# Altium PCB PCB_Hammond_1591GSGY-test.PcbDoc
Units mil, origin at the board's own origin, x right, y up, seen from the top; angles counter-clockwise.
Board outline 4566.93 x 3503.94 mil, 2 copper layers (Top Layer, Bottom Layer); 47 components, 80 nets, 349 pads, 105 vias.
Unrouted connection lines stored in the file: 2.
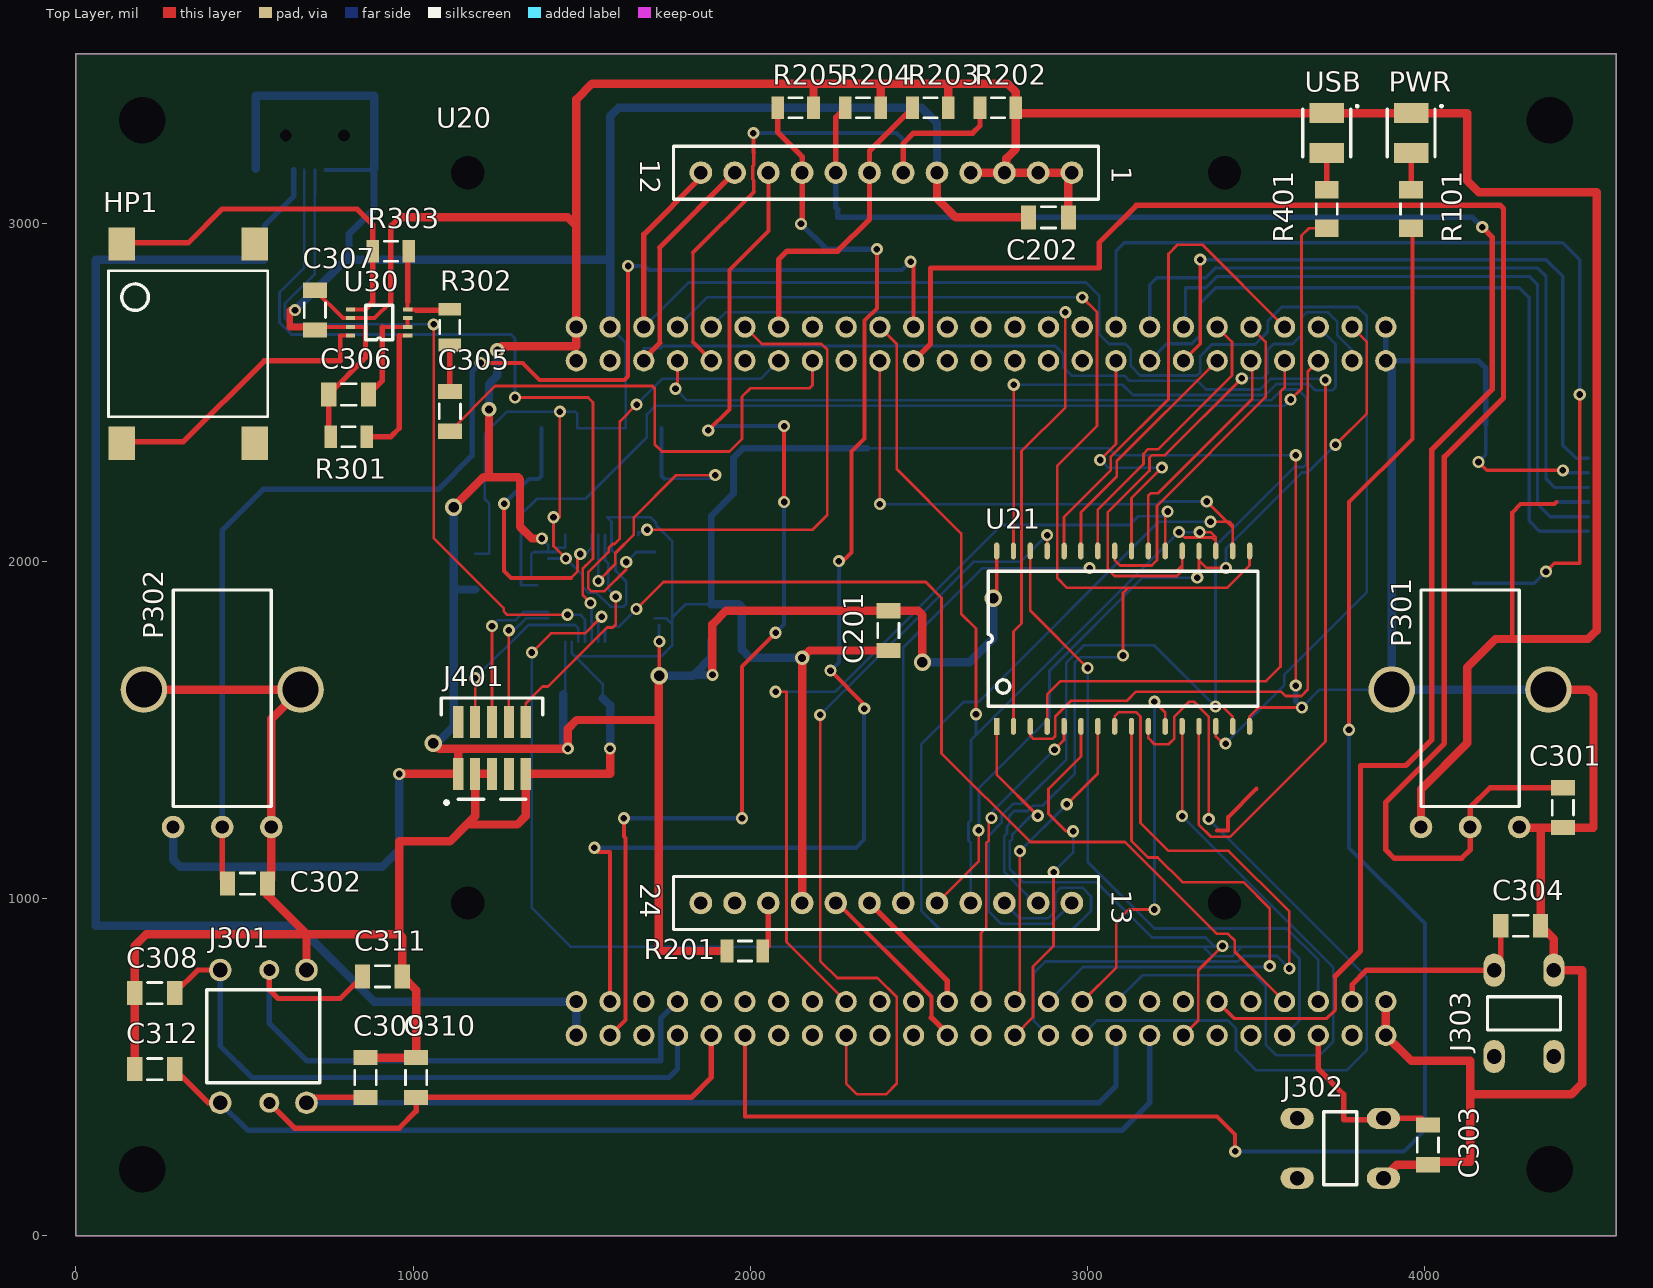
[diagram p0: Top Layer view]
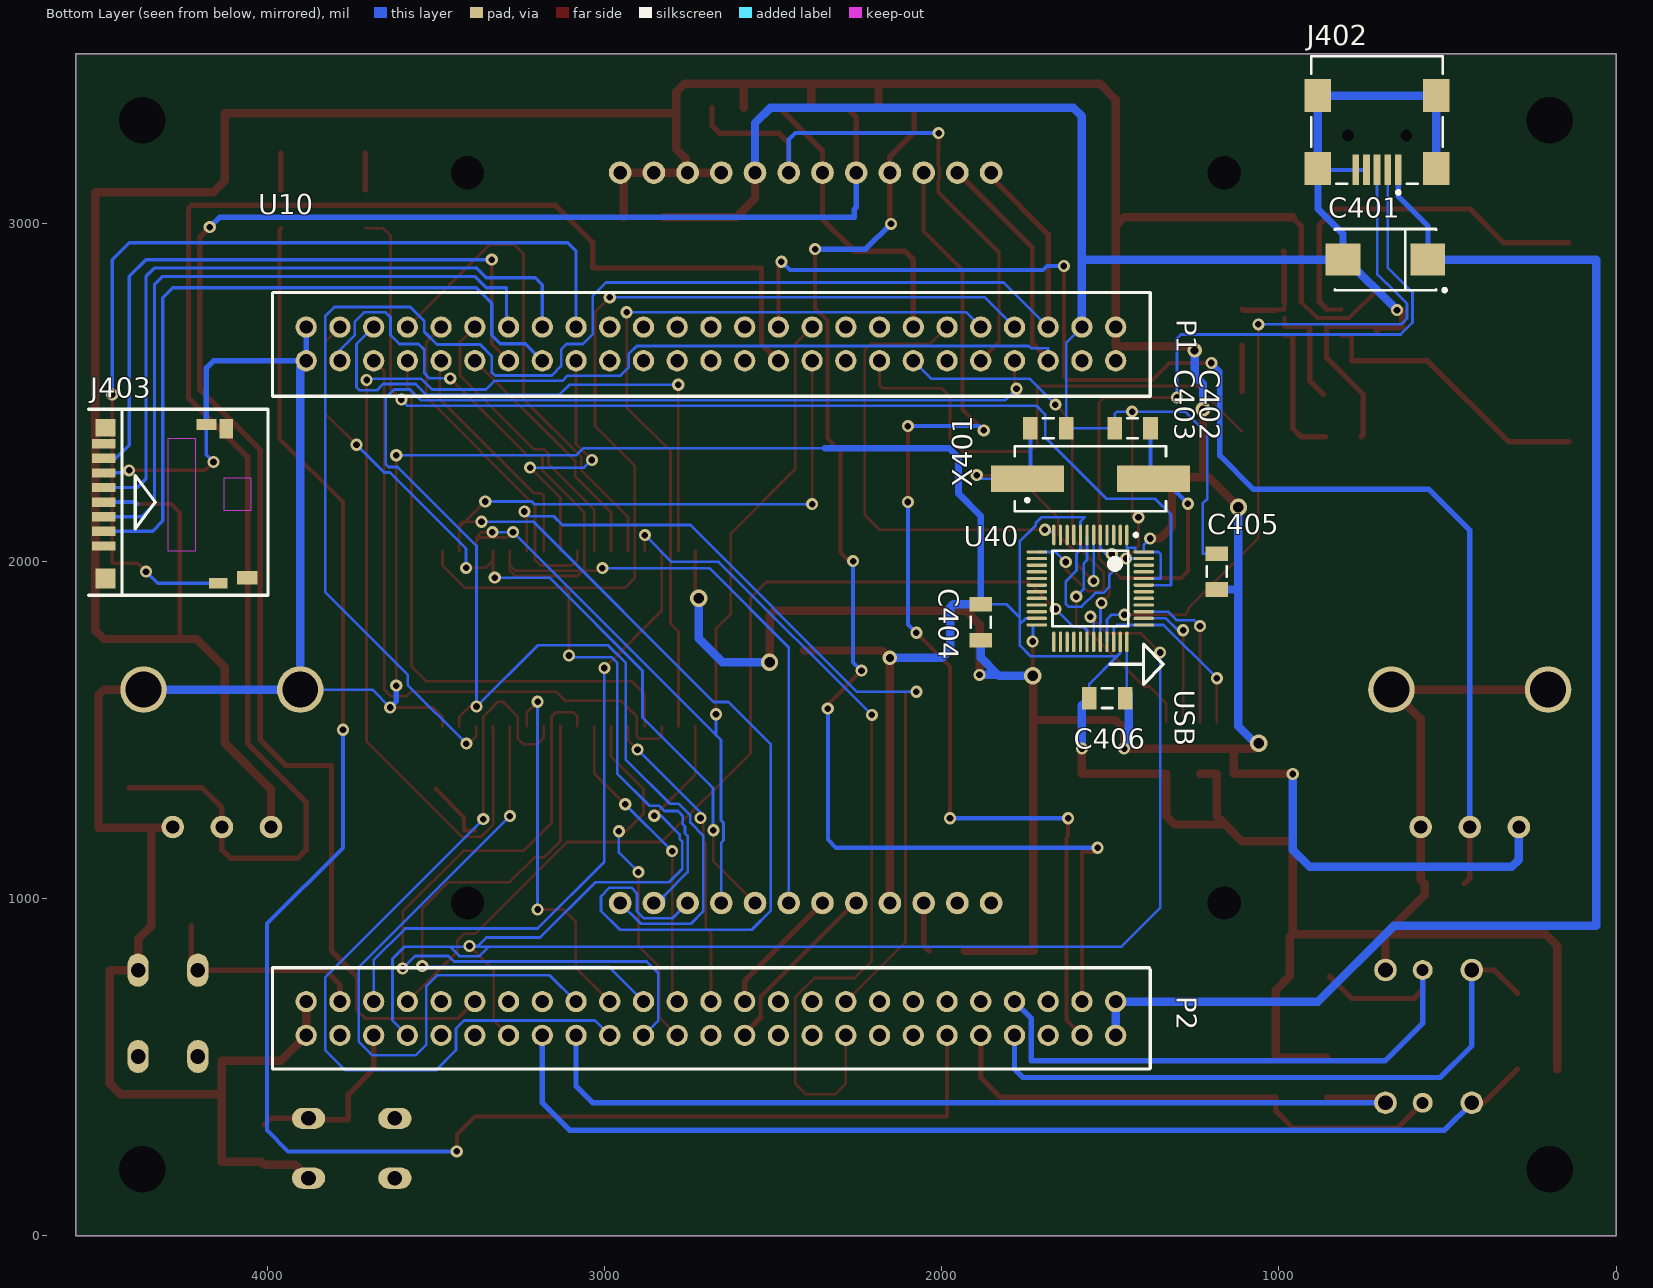
[diagram p1: Bottom Layer view, seen from below]

## Layer stack, top to bottom
Top Layer: signal copper 1.4
Dielectric: dielectric 12.6, FR-4, Dk 4.8
Bottom Layer: signal copper 1.4

## Board outline
0,0 4566.93,0 4566.93,3503.94 0,3503.94

## Design rules (kind name [scope] priority, off if disabled: settings)
Clearance "Polygon Clearance" [InPolygon] p1: gap=16
Clearance [All] p2: gap=8
ComponentClearance [All] p1 off: gap=10 collisioncheckmode=3 verticalgap=10 showdistances=FALSE
DiffPairsRouting [All] p1: maxlimit=393.7 minlimit=4.92 mostfreqgap=5.91 maxuncoupledlength=500
FabricationTestPointUsage FabricationTestPointUsage_1 [All] p1: valid=0 allowmultiple=FALSE
FabricationTestpoint FabricationTestpoint_1 [All] p1: side=3 testpointundercomponent=TRUE minsize=40 maxsize=100 preferedsize=60 minholesize=0 maxholesize=40 preferedholesize=32 testpointgrid=1 allowsidetop=TRUE allowsidebottom=TRUE usegrid=TRUE gridtolerance=0.01
HoleSize [All] p1: absolutevalues=TRUE maxlimit=236.22 minlimit=7.87 maxpercent=80.000 minpercent=20.000
HoleSize FabricationTestpoint [All] p2 off: absolutevalues=TRUE maxlimit=100 minlimit=1 maxpercent=80.000 minpercent=20.000
HoleSize FabricationTestPointUsage [All] p3 off: absolutevalues=TRUE maxlimit=100 minlimit=1 maxpercent=80.000 minpercent=20.000
MinimumSolderMaskSliver [All] p1: minsoldermaskwidth=1.93
PlaneClearance [All] p1: clearance=19.68
PlaneConnect [All] p1: planeconnectstyle=Relief reliefexpansion=15.75 reliefentries=4 reliefconductorwidth=5.91 reliefairgap=5.91
PolygonConnect [All] p1: connectstyle=Relief reliefconductorwidth=5.91 reliefentries=4 polygonreliefangle="90 Angle" airgapwidth=10
RoutingCorners [All] p1: cornerstyle=45-Degree minsetback=49.21 maxsetback=49.21
RoutingVias [All] p1: holewidth=19.68 width=35.83 viastyle="Through Hole" minholewidth=19.68 minwidth=35.83 maxholewidth=78.74 maxwidth=86.61
SilkscreenOverComponentPads [All] p1: minsilkscreentomaskgap=10
SolderMaskExpansion [All] p1: expansion=2.95
Width [All] p1: maxlimit=393.7 minlimit=8 preferedwidth=8
18 further rules are at their usual default settings.

## Classes and differential pairs
net class D[0..7]: D0 D1 D2 D3 D4 D5 D6 D7
net class A[0..18]: A0 A1 A2 A3 A4 A5 A6 A7 A8 A9 A10 A11 A12 A13 A14 A15 A16 A17 A18
component class Power_Debug: C401 C402 C403 C404 C405 C406 J401 J402 J403 R401 U40 USB X401
component class MCU: PWR R101 U10
component class LCD_SRAM: C201 C202 R201 R202 R203 R204 R205 U20 U21
component class Audio_Keys: C301 C302 C303 C304 C305 C306 C307 C308 C309 C310 C311 C312 HP1 J301 J302 J303 P301 P302 R301 R302 R303 U30

## Components (designator, comment, footprint, x,y, rotation, side; value= is the part's Value field where it differs from the comment)
C201 "CAP 100nF 16V 1206(3216)" CAPC1206(3216)100_N 2408.91,1793.91 r270 top
C202 "CAP 100nF 16V 1206(3216)" CAPC1206(3216)100_N 2883.91,3018.91 r180 top
C301 "CAP 100nF 16V 1206(3216)" CAPC1206(3216)100_N 4408.91,1268.91 r90 top
C302 "CAP 100nF 16V 1206(3216)" CAPC1206(3216)100_N 508.91,1043.91 r180 top
C303 "CAP 100nF 16V 1206(3216)" CAPC1206(3216)100_N 4008.91,268.91 r90 top
C304 "CAP 100nF 16V 1206(3216)" CAPC1206(3216)100_N 4283.91,918.91 r180 top
C305 "CAP 100nF 16V 1206(3216)" CAPC1206(3216)100_N 1108.91,2443.91 r270 top
C306 "CAP 100nF 16V 1206(3216)" CAPC1206(3216)100_N 808.91,2493.91 r180 top
C307 "CAP 100nF 16V 1206(3216)" CAPC1206(3216)100_N 708.91,2743.91 r270 top
C308 "CAP 100nF 16V 1206(3216)" CAPC1206(3216)100_N 233.91,718.91 r180 top
C309 "CAP 100nF 16V 1206(3216)" CAPC1206(3216)100_N 858.91,468.91 r90 top
C310 "CAP 100nF 16V 1206(3216)" CAPC1206(3216)100_N 1008.91,468.91 r90 top
C311 "CAP 100nF 16V 1206(3216)" CAPC1206(3216)100_N 908.91,768.91 r0 top
C312 "CAP 100nF 16V 1206(3216)" CAPC1206(3216)100_N 233.91,493.91 r180 top
C401 "Cap Pol3" "EIA 7343-31 D" 683.91,2893.91 r0 bottom
C402 "Cap Semi" CAPC3216L 1433.91,2393.91 r0 bottom
C403 "Cap Semi" CAPC3216L 1683.91,2393.91 r180 bottom
C404 "Cap Semi" CAPC3216L 1883.91,1818.91 r270 bottom
C405 "Cap Semi" CAPC3216L 1183.91,1968.91 r270 bottom
C406 "Cap Semi" CAPC3216L 1508.91,1593.91 r180 bottom
HP1 "NDT-03C" NDT-03C 530,2940 r270 top locked
J301 "SKQUCAA010" SKQUCAA010 683.91,393.91 r90 top locked
J302 "SPST MicroSwitch" SPST_MicroSwitch 3758.91,268.91 r180 top locked
J303 "SPST MicroSwitch" SPST_MicroSwitch 4283.91,668.91 r270 top locked
J401 "JTAG-10" 2199SB-10G-301523 1333.91,1368.91 r90 top
J402 "440247-1" 440247 708.91,3468.91 r90 bottom locked
J403 "DM3D-SF" DM3D-SF 4508.91,1918.91 r270 bottom locked
P301 "POT Type 51" "POT Type 51" 4133.91,1618.91 r0 top locked
P302 "POT Type 51" "POT Type 51" 433.91,1618.91 r0 top locked
PWR "TopLed" PLCC-2 3958.91,3268.91 r90 top
R101 "Res_EU" RESC3216N 3958.91,3043.91 r90 top
R201 "10K" RESC1206(3216)_L 1983.91,843.91 r0 top
R202 "10K" RESC1206(3216)_L 2733.91,3343.91 r180 top
R203 "10K" RESC1206(3216)_L 2533.91,3343.91 r180 top
R204 "10K" RESC1206(3216)_L 2333.91,3343.91 r180 top
R205 "10K" RESC1206(3216)_L 2133.91,3343.91 r180 top
R301 "10K" RESC1206(3216)_L 808.91,2368.91 r0 top
R302 "10K" RESC1206(3216)_L 1108.91,2693.91 r90 top
R303 "10K" RESC1206(3216)_L 933.91,2918.91 r180 top
R401 "Res_EU" RESC3216N 3708.91,3043.91 r90 top
U10 "STM32F3-DISCOVERY" STM32F3-DISCOVERY 2483.91,1693.91 r270 bottom locked
U20 "INT024BTFT" INT024BTFT 2283.91,2068.91 r270 top locked
U21 "AS64C4008" SOP32 2730,1510 r90 top
U30 "TS4990" MiniSOP-8 983.91,2668.91 r180 top
U40 "STM32F103C4T6A" LQFP48_L 1558.91,1918.91 r270 bottom
USB "TopLed" PLCC-2 3708.91,3268.91 r90 top
X401 "HC49/4H_SMX" HC49/4H_SMX 1558.91,2243.91 r180 bottom

## Footprints (in the part's own frame and the unit in brackets; to place one, negate y for a bottom-side part, rotate by r counter-clockwise, add the part's x,y. Pads: shape width x height; smd on the part's side, far side on the other; paste and mask are expansions set on the pad)
2199SB-10G-301523 [mm] "Embase male 2x5 contacts, 1.27 mm"
  rect 2.4x0.76 smd: 1(0,5.08) 2(3.9,5.08) 3(0,3.81) 4(3.9,3.81) 5(0,2.54) 6(3.9,2.54) 7(0,1.27) 8(3.9,1.27) 9(0,0) 10(3.9,0)
  silkscreen extent -2.29,-1.27 5.71,6.35, body extent -1.3,-0.48 5.2,5.56, height 4.55
440247 [mm] "Connector; USB2.0, Type B, SM; 5 Position; Right Angle"
  rect 2.3x0.5 smd: 1(-7.85,-1.6) 2(-7.85,-0.8) 3(-7.85,0) 4(-7.85,0.8) 5(-7.85,1.6)
  rect 2.5x2 smd: 6(-7.75,4.45) 7(-2.25,4.45) 8(-7.75,-4.45) 9(-2.25,-4.45)
  round 0.6 hole 0.9 unplated: MH1(-5.25,2.2) MH2(-5.25,-2.2)
  silkscreen extent -9.67,-4.95 0.7,4.95
CAPC1206(3216)100_N [mm] "Chip Capacitor, Body 3.2x1.6mm, Height 1mm, IPC Medium Density"
  rect 1.15x1.8 smd: 1(-1.5,0) 2(1.5,0)
  silkscreen extent -0.55,-0.8 0.55,0.8, body extent -1.7,-0.9 1.7,0.9, height 1
CAPC3216L [mm] "Chip Capacitor, Body 3.2x1.6mm, IPC High Density"
  rect 1.1x1.7 smd: 1(-1.35,0) 2(1.35,0)
  silkscreen extent -0.4,-0.75 0.4,0.75, body extent -1.7,-0.9 1.7,0.9, height 1.3
DM3D-SF [mm] "MicroSD card connector"
  rect 0.7x1.75 smd: 1(-3.2,0.625) 2(-4.3,0.625) 3(-5.4,0.625) 4(-6.5,0.625) 5(-7.6,0.625) 6(-8.7,0.625) 7(-9.8,0.625) 8(-10.9,0.625)
  rect 0.8x1.4 smd: A(-0.4,9.25)
  rect 0.8x1.5 smd: B(-12.35,8.35)
  rect 1.5x1.5 smd: G0(-0.75,0.75)
  rect 1.3x1.5 smd: G1(-12.1,0.75)
  rect 1x1.55 smd: G2(-0.8,11.425)
  rect 1.45x1 smd: G3(-12.025,9.85)
  Top Layer keep-out region: -8.35,11.7 -5.85,11.7 -5.85,9.7 -8.35,9.7
  Top Layer keep-out region: -11.3,7.5 -2.8,7.5 -2.8,5.5 -11.3,5.5
  silkscreen extent -13.5,-0.5 0.5,13
"EIA 7343-31 D" [mm] "Capacitor, SM Tantalum; Body 7.3 x 4.3 mm (LxW typ)"
  rect 2.6x2.4 smd: 1(-3.2,0) 2(3.2,0)
  silkscreen extent -4.57,-2.3 3.8,2.42
HC49/4H_SMX [mm] "Surface Mount Quartz Crystal; Body 13.4 (inc. leads) x 4.9 mm (LxW max)"
  rect 5.5x2 smd: 1(-4.75,0) 2(4.75,0)
  silkscreen extent -5.7,-2.45 5.7,2.45
INT024BTFT [mm]
  round 1.7 hole 1: 1(-27.5,17) 2(-27.5,14.46) 3(-27.5,11.92) 4(-27.5,9.38) 5(-27.5,6.84) 6(-27.5,4.3) 7(-27.5,1.76) 8(-27.5,-0.78) 9(-27.5,-3.32) 10(-27.5,-5.86) 11(-27.5,-8.4) 12(-27.5,-10.94) 13(27.5,17) 14(27.5,14.46) 15(27.5,11.92) 16(27.5,9.38) 17(27.5,6.84) 18(27.5,4.3) 19(27.5,1.76) 20(27.5,-0.78) 21(27.5,-3.32) 22(27.5,-5.86) 23(27.5,-8.4) 24(27.5,-10.94)
  round 1.524 hole 2.5 unplated: D1(-27.5,28.5) D2(27.5,28.5) D3(27.5,-28.5) D4(-27.5,-28.5)
  silkscreen extent -29.5,-13 29.5,19
LQFP48_L [mm] "Thin QFP, 48-Leads, Body 7x7mm, Pitch 0.5mm, IPC High Density"
  oval 1.55x0.25 smd: 1(-4.025,2.75) 2(-4.025,2.25) 3(-4.025,1.75) 4(-4.025,1.25) 5(-4.025,0.75) 6(-4.025,0.25) 7(-4.025,-0.25) 8(-4.025,-0.75) 9(-4.025,-1.25) 10(-4.025,-1.75) 11(-4.025,-2.25) 12(-4.025,-2.75) 25(4.025,-2.75) 26(4.025,-2.25) 27(4.025,-1.75) 28(4.025,-1.25) 29(4.025,-0.75) 30(4.025,-0.25) 31(4.025,0.25) 32(4.025,0.75) 33(4.025,1.25) 34(4.025,1.75) 35(4.025,2.25) 36(4.025,2.75)
  oval 0.25x1.55 smd: 13(-2.75,-4.025) 14(-2.25,-4.025) 15(-1.75,-4.025) 16(-1.25,-4.025) 17(-0.75,-4.025) 18(-0.25,-4.025) 19(0.25,-4.025) 20(0.75,-4.025) 21(1.25,-4.025) 22(1.75,-4.025) 23(2.25,-4.025) 24(2.75,-4.025) 37(2.75,4.025) 38(2.25,4.025) 39(1.75,4.025) 40(1.25,4.025) 41(0.75,4.025) 42(0.25,4.025) 43(-0.25,4.025) 44(-0.75,4.025) 45(-1.25,4.025) 46(-1.75,4.025) 47(-2.25,4.025) 48(-2.75,4.025)
  silkscreen extent -4.15,-2.85 2.85,3.55, body extent -3.5,-3.5 3.5,3.5, height 1.6
MiniSOP-8 [mm]
  rect 0.7x0.3 smd: 1(0,0) 2(0,-0.65) 3(0,-1.3) 4(0,-1.95) 5(4.3,-1.95) 6(4.3,-1.3) 7(4.3,-0.65) 8(4.3,0)
  silkscreen extent 1.13,-2.28 3.16,0.33
NDT-03C [mm]
  rect 2.5x2 smd: 1(0,0) 2(0,-10) 3(15,-10) 4(15,0)
  silkscreen extent 2,-11 13,1
PLCC-2 [mm]
  rect 1.5x2.6 smd: A(-1.5,0) K(1.5,0)
  silkscreen extent -1.8,-2.34 2.08,1.8
"POT Type 51" [mm]
  round 1.7 hole 1: 1(-3.7,-10.35) 2(0,-10.35) 3(3.7,-10.35)
  round 3.5 hole 2.7: 4(-5.9,0) 5(5.9,0)
  silkscreen extent -3.7,-8.8 3.7,7.5
RESC1206(3216)_L [mm] "Chip Resistor, Body 3.2x1.6mm, IPC High Density"
  rect 0.95x1.7 smd: 1(-1.35,0) 2(1.35,0)
  silkscreen extent -0.5,-0.75 0.5,0.75, body extent -1.67,-0.87 1.67,0.87, height 0.75
RESC3216N [mm] "Chip Resistor, Body 3.2x1.6mm, IPC Medium Density"
  rect 1.3x1.8 smd: 1(-1.45,0) 2(1.45,0)
  silkscreen extent -0.4,-0.8 0.4,0.8, body extent -1.68,-0.87 1.68,0.87, height 0.71
SKQUCAA010 [mm] "4 ways + Center switch"
  round 1.7 hole 1.1: 1(0,6.5) 3(0,0) 4(10,0) 6(10,6.5)
  round 1.5 hole 0.9: 2(0,2.8) 5(10,2.8)
  silkscreen extent 1.5,-1 8.5,7.5
SOP32 [mil]
  rect 50x16 smd: 1(0,0)
  oval 50x16 smd: 2(0,-50) 3(0,-100) 4(0,-150) 5(0,-200) 6(0,-250) 7(0,-300) 8(0,-350) 9(0,-400) 10(0,-450) 11(0,-500) 12(0,-550) 13(0,-600) 14(0,-650) 15(0,-700) 16(0,-750) 17(520,-750) 18(520,-700) 19(520,-650) 20(520,-600) 21(520,-550) 22(520,-500) 23(520,-450) 24(520,-400) 25(520,-350) 26(520,-300) 27(520,-250) 28(520,-200) 29(520,-150) 30(520,-100) 31(520,-50) 32(520,0)
  silkscreen extent 60,-775 460,25
SPST_MicroSwitch [mm]
  oval 2.5x1.6 hole 1.1: 1(-3,2.5) 2(3.5,2.5) 3(-3,-2) 4(3.5,-2)
  silkscreen extent -1,-2.5 1.5,3
STM32F3-DISCOVERY [mm]
  round 1.6 hole 1: 1(-25.4,25.4) 2(-22.86,25.4) 3(-25.4,22.86) 4(-22.86,22.86) 5(-25.4,20.32) 6(-22.86,20.32) 7(-25.4,17.78) 8(-22.86,17.78) 9(-25.4,15.24) 10(-22.86,15.24) 11(-25.4,12.7) 12(-22.86,12.7) 13(-25.4,10.16) 14(-22.86,10.16) 15(-25.4,7.62) 16(-22.86,7.62) 17(-25.4,5.08) 18(-22.86,5.08) 19(-25.4,2.54) 20(-22.86,2.54) 21(-25.4,0) 22(-22.86,0) 23(-25.4,-2.54) 24(-22.86,-2.54) 25(-25.4,-5.08) 26(-22.86,-5.08) 27(-25.4,-7.62) 28(-22.86,-7.62) 29(-25.4,-10.16) 30(-22.86,-10.16) 31(-25.4,-12.7) 32(-22.86,-12.7) 33(-25.4,-15.24) 34(-22.86,-15.24) 35(-25.4,-17.78) 36(-22.86,-17.78) 37(-25.4,-20.32) 38(-22.86,-20.32) 39(-25.4,-22.86) 40(-22.86,-22.86) 41(-25.4,-25.4) 42(-22.86,-25.4) 43(-25.4,-27.94) 44(-22.86,-27.94) 45(-25.4,-30.48) 46(-22.86,-30.48) 47(-25.4,-33.02) 48(-22.86,-33.02) 49(-25.4,-35.56) 50(-22.86,-35.56) 51(25.4,25.4) 52(27.94,25.4) 53(25.4,22.86) 54(27.94,22.86) 55(25.4,20.32) 56(27.94,20.32) 57(25.4,17.78) 58(27.94,17.78) 59(25.4,15.24) 60(27.94,15.24) 61(25.4,12.7) 62(27.94,12.7) 63(25.4,10.16) 64(27.94,10.16) 65(25.4,7.62) 66(27.94,7.62) 67(25.4,5.08) 68(27.94,5.08) 69(25.4,2.54) 70(27.94,2.54) 71(25.4,0) 72(27.94,0) 73(25.4,-2.54) 74(27.94,-2.54) 75(25.4,-5.08) 76(27.94,-5.08) 77(25.4,-7.62) 78(27.94,-7.62) 79(25.4,-10.16) 80(27.94,-10.16) 81(25.4,-12.7) 82(27.94,-12.7) 83(25.4,-15.24) 84(27.94,-15.24) 85(25.4,-17.78) 86(27.94,-17.78) 87(25.4,-20.32) 88(27.94,-20.32) 89(25.4,-22.86) 90(27.94,-22.86) 91(25.4,-25.4) 92(27.94,-25.4) 93(25.4,-27.94) 94(27.94,-27.94) 95(25.4,-30.48) 96(27.94,-30.48) 97(25.4,-33.02) 98(27.94,-33.02) 99(25.4,-35.56) 100(27.94,-35.56)
  silkscreen extent -28,-38.1 30.48,29

## Part data
C201 C202 C301 C302 C303 C304 C305 C306 C307 C308 C309 C310 C311 C312: library part CMP-1037-04185-1, "CAP 100nF 16V -20% to +80% 1206 (3216 Metric) Thickness 1mm SMD"
C401: "Polarized Capacitor (Surface Mount)"
C402 C403 C404 C405 C406: "Capacitor (Semiconductor SIM Model)"
HP1: "Audio HP"
J301: "4 ways + center switch"
J302 J303: "SPST - MicroSwitch"
J402: "USB 2.0, Right Angle, SMT, B Type, Receptacle, 5 Position, Black"
P301 P302: "25mm Diameter potentiometer"
R101 R401: "Resistor"
R201 R202 R203 R204 R205 R301 R302 R303: library part CMP-1014-00623-1, "10K 0.25W 1% 1206 (3216 Metric)  SMD"
U10: "STM32F3-Discovery"
U20: library part "LCD INT024BTFT"
U21: "SRAM 4Mbits 512K*8Bits 55 ns"
U40: "STM32 ARM-based 32-bit MCU Performance Line with 16 kB Flash, 6 kB Internal RAM, Internal Code A, -40 to +85°C Temperature, 48-Pin LQFP, Tray"
X401: "Surface Mount Quartz Crystal"

## Free pads (board coordinates)
  round 129.92 hole 137.8: 1(196.85,196.85) 1(196.85,3307.09) 1(4370.08,196.85) 1(4370.08,3307.09)

## Via types
v1: diameter 35.83, hole 19.68, Top Layer to Bottom Layer, 97 vias
v2: diameter 51.18, hole 31.5, Top Layer to Bottom Layer, 5 vias
v3: diameter 43.31, hole 23.62, Top Layer to Bottom Layer, 3 vias

## Nets (pads, with @x,y where several pads share a name; then routed paths per layer and width w, separated by ;. In a path a pad name is that pad's centre, name@x,y a point inside that pad or via, vN(x,y) a via of type N, cw(c..) or ccw(c..) an arc to the next point about the centre after c; other vN are vias at no path point)
5V: C401.1 J402.1 U10.51 U10.52 | length 4394.6
  Bottom Layer w16: C401.1 557.93,2992.93 645.92,3080.92 J402.1
  Bottom Layer w25: C401.1 58.91,2893.91 58.91,918.91 658.91,918.91 883.91,693.91 U10.51 U10.52
A0: U10.83 U21.12 | length 2014
  Top Layer w8: v1(3280,1243.82) U21.12
  Bottom Layer w8: U10.83 3161.91,771.91 3495.91,771.91 3527.91,739.91 3527.91,566.41 3559.91,534.41 3687.91,534.41 3727.91,574.41 3727.91,795.91 v1(3280,1243.82)
A1: U10.81 U21.11 | length 1108.9
  Top Layer w8: U10.81 3084.91,794.91 3084.91,930.91 3120.91,966.91 v1(3197.91,966.91) ; v1(3197.91,1582.91) 3230,1550.82 U21.11
  Bottom Layer w8: v1(3197.91,966.91) v1(3197.91,1582.91)
A2: U10.82 U21.10 | length 2498.5
  Top Layer w8: U21.10 3180,1474.91 3198,1456.91 3239.91,1456.91 3256.91,1473.91 3256.91,1538.91 3300.91,1582.91 3314.91,1582.91 3358.91,1538.91 v1(3358.91,1234.91)
  Bottom Layer w8: U10.82 3027.91,637.91 3415.91,637.91 3439.91,613.91 3439.91,549.91 3499.91,489.91 3766.91,489.91 3827.91,550.91 3827.91,765.91 v1(3358.91,1234.91)
A3: U10.79 U21.9 | length 1703.3
  Top Layer w8: U21.9 3130,1170.57 3179.42,1121.15 3207.67,1121.15 3280.91,1047.91 3462.49,1047.91 3539.91,970.49 v1(3539.91,798.91)
  Bottom Layer w8: U10.79 2986.55,796.55 3537.55,796.55 v1(3539.91,798.91)
A4: U10.80 U21.8 | length 2147.2
  Top Layer w8: U21.8 3080,1538.91 3093,1551.91 3143.91,1551.91 3156.91,1538.91 3156.91,1223.91 3239.91,1140.91 3417.91,1140.91 3597.91,960.91 v1(3597.91,791.91)
  Bottom Layer w8: U10.80 2839.91,637.91 2839.91,777.91 2874.55,812.55 3445.76,812.55 3462.12,828.91 3560.91,828.91 v1(3597.91,791.91)
A5: U10.77 U21.7 | length 918
  Top Layer w8: U10.77 2798.91,708.91 v1(2798.91,1139.91) ; v1(2937.91,1278.91) 3030,1371 U21.7
  Bottom Layer w8: v1(2798.91,1139.91) v1(2937.91,1278.91)
A6: U10.78 U21.6 | length 1070
  Top Layer w8: U10.78 2837.91,647.91 2837.91,797.91 2898.91,858.91 v1(2898.91,1077.91) ; v1(2956.91,1198.91) 2936,1198.91 2884,1250.91 2884,1324.91 2980,1420.91 U21.6
  Bottom Layer w8: v1(2898.91,1077.91) 2956.91,1135.91 v1(2956.91,1198.91)
A7: U10.75 U21.5 | length 918
  Top Layer w8: U10.75 2683.91,896.91 2698.91,911.91 2698.91,1163.84 2706.82,1171.76 2706.82,1230.35 v1(2714.91,1238.43) ; v1(2901.48,1441) 2930,1469.52 U21.5
  Bottom Layer w8: v1(2714.91,1238.43) 2714.91,1254.43 v1(2901.48,1441)
A8: U10.40 U21.27 | length 731.2
  Top Layer w8: U21.27 2980,2144.73 3086.26,2251 3086.26,2296.26 U10.40
A9: U10.39 U21.26 | length 864.7
  Top Layer w8: U21.26 3030,2152.5 3165.36,2287.86 3165.36,2318.14 3179.17,2331.96 3209.45,2331.96 3427.91,2550.41 3427.91,2649.91 U10.39
A10: U10.42 U21.23 | length 706
  Top Layer w8: U21.23 3180,2194.25 3187.15,2201.4 3209.33,2201.4 3487.74,2479.81 3487.74,2590.08 U10.42
A11: U10.41 U21.25 | length 1008.9
  Top Layer w8: U21.25 3080,2002.91 3096,1986.91 3189.91,1986.91 3205.6,2002.6 3205.6,2163.84 3527.91,2486.16 3527.91,2649.91 U10.41
A12: U10.44 U21.4 | length 1732.8
  Top Layer w8: U21.4 2880,1605 2918.91,1643.91 3528.91,1643.91 3572,1687 3572,2502.91 3583.91,2514.82 U10.44
A13: U10.43 U21.28 | length 1465.5
  Top Layer w8: U21.28 2930,2130.62 3068.32,2268.94 3068.32,2308.23 3239.91,2479.82 3239.91,2910.91 3266.91,2937.91 3339.91,2937.91 U10.43
A14: U10.46 U21.3 | length 1946.9
  Top Layer w8: U21.3 2830,1482.82 2839.91,1472.91 2895.91,1472.91 2903.91,1480.91 2903.91,1538.91 2950.91,1585.91 3116.91,1585.91 3143.91,1612.91 3573.81,1612.91 3586.64,1600.08 3633.72,1600.08 3652.55,1618.91 3652.55,2562.55 U10.46
A15: U10.45 U21.31 | length 1684.2
  Top Layer w8: U21.31 2780,2099 2780.91,2099.91 v1(2780.91,2522.91)
  Bottom Layer w8: v1(2780.91,2522.91) 3103.92,2522.91 3134.2,2492.62 3527.21,2492.62 3559.41,2524.82 3656.28,2524.82 3674.51,2506.59 3726.5,2506.59 3734.82,2514.91 3734.82,2643 U10.45
A16: U10.9 U21.2 | length 2359.9
  Top Layer w8: U21.2 2780,1791 2803.91,1814.91 2803.91,2325.91 2933.91,2455.91 v1(2933.91,2737.91)
  Bottom Layer w8: U10.9 1927.91,2737.91 v1(2933.91,2737.91)
A17: U10.95 U21.30 | length 1919.6
  Top Layer w8: U21.30 2830,1852.82 v1(2999.91,1682.91)
  Bottom Layer w8: v1(2999.91,1682.91) 2999.91,1108.53 3197.53,910.91 3589.91,910.91 3683.91,816.91 U10.95
A18: U10.88 U21.1 | length 1558.2
  Top Layer w8: U21.1 2730,1366.91 v1(2852,1244.91) ; U10.88 3327.91,637.91 3327.91,786.91 v1(3399.91,858.91)
  Bottom Layer w8: v1(2852,1244.91) 2832.29,1244.91 2776.82,1189.44 2776.82,1176.52 2768.91,1168.6 2768.91,1086.7 2807.91,1047.7 3026.33,1047.7 3190.11,883.91 3349.91,883.91 3374.91,858.91 v1(3399.91,858.91)
D0: U10.6 U20.11 U21.13 | length 4693.3
  Top Layer w8: U21.13 3330,1492.91 3328.91,1491.82 3328.91,1218.91 3364.91,1182.91 3422.91,1182.91 3704.91,1464.91 v1(3704.91,2536.91)
  Top Layer w12: 1731.28,2646.54 1731.28,2929.67
  Top Layer w16: U10.6 1683.91,2599.17 1731.28,2646.54 ; 1731.28,2929.67 U20.11
  Bottom Layer w8: U10.6 1683.91,2630.91 1733.91,2630.91 1740.91,2637.91 2903.91,2637.91 2927.91,2613.91 2927.91,2573.91 2951.91,2549.91 3108.92,2549.91 3124.41,2534.41 3325.61,2534.41 3351.4,2508.62 3511.21,2508.62 3543.41,2540.82 3701,2540.82 v1(3704.91,2536.91)
D1: U10.5 U20.12 U21.14 | length 4586.7
  Top Layer w8: U21.14 3380,1479.82 3391.91,1467.91 3399.91,1467.91 v1(3408.91,1458.91)
  Top Layer w16: U10.5 1683.91,2968.91 1853.2,3138.2 U20.12
  Bottom Layer w8: U10.5 1815.91,2825.91 2994.91,2825.91 3033.91,2786.91 3033.91,2673.91 3063.91,2643.91 3111.91,2643.91 3127.91,2627.91 3127.91,2577.91 3155.41,2550.41 3324.41,2550.41 3333.91,2559.91 3333.91,2607.91 3367.91,2641.91 3495.91,2641.91 3533.91,2679.91 3533.91,2711.91 3575.41,2753.41 3800.41,2753.41 3827.91,2725.91 3827.91,1908.01 3583.22,1663.32 3583.22,1633.22 v1(3408.91,1458.91)
D2: U10.8 U20.13 U21.15 | length 4802.4
  Top Layer w8: v1(1777.91,2510.91) 1777.91,2517.91 1783.91,2523.91 U10.8 ; v1(3378.91,1568.91) 3400,1568.91 3430,1538.91 U21.15
  Bottom Layer w8: v1(1777.91,2510.91) 1812.2,2476.62 3543.62,2476.62 3575.82,2508.82 3623.91,2508.82 3647.91,2484.82 3647.91,2286.97 3639.91,2278.97 3612.61,2278.97 3378.91,2045.26 v1(3378.91,1568.91) 3197.48,1750.34 2988.34,1750.34 2936.91,1698.91 2936.91,1411.56 2806.09,1280.73 2780.07,1280.73 2744.82,1245.48 2744.82,1224.82 2706.91,1186.91 2706.91,960.91 2743.05,924.77 2891.74,924.77 U20.13
D3: U10.7 U20.14 U21.17 | length 4046.8
  Top Layer w8: v1(2983.91,2781.91) 3027.91,2737.91 3027.91,2400.91 2909.91,2282.91 2909.91,1949.17 2938.46,1920.62 3119.62,1920.62 ; v1(3104.91,1719.91) 3104.91,1905.91 3119.62,1920.62 ; U21.17 3480,1986.91 3413.71,1920.62 3119.62,1920.62
  Bottom Layer w8: U10.7 1871.91,2781.91 v1(2983.91,2781.91) ; U20.14 2821.91,986.23 2821.91,1008.91 2752.91,1077.91 2752.91,1184.6 2760.82,1192.52 2760.82,1212.82 2767.91,1219.91 2767.91,1244.91 2781.91,1258.91 2821.91,1258.91 2837.82,1274.82 2866.82,1274.82 2961.91,1369.91 2961.91,1698.91 2978.26,1715.26 3100.26,1715.26 v1(3104.91,1719.91)
D4: U10.20 U20.15 U21.18 | length 4225.7
  Top Layer w8: v1(2383.91,2168.91) U10.20 ; v1(3353.09,2176.82) 3413.3,2116.61 ; v1(3364.3,2116.61) 3413.3,2116.61 ; U21.18 3430,2099.91 ; 3413.3,2116.61 3430,2099.91 ; 3413.3,2116.61 3420.67,2116.61 3430,2107.28 3430,2099.91
  Bottom Layer w8: v1(2383.91,2168.91) 3207,2168.91 3214.91,2176.82 v1(3353.09,2176.82) ; U20.15 2798.67,940.77 2882.77,940.77 2902.91,960.91 2902.91,1014.7 2919.91,1031.7 2984.12,1031.7 3009.91,1005.91 3009.91,962.91 2953.91,906.91 2562.91,906.91 2506.91,962.91 2506.91,1457.19 2632.19,1582.47 2675.77,1582.47 3209.91,2116.61 v1(3364.3,2116.61)
D5: U10.19 U20.16 U21.19 | length 2965
  Top Layer w8: U10.19 2433.91,2643.91 2433.91,2272.91 2624.91,2081.91 2624.91,1843.91 2668.91,1799.91 v1(2668.91,1545.91) ; v1(3270.91,2085.91) 3286.91,2069.91 3369,2069.91 3380,2058.91 ; v1(3332,2085.91) 3364,2085.91 3380,2069.91 3380,2058.91 ; U21.19 3380,2058.91
  Bottom Layer w8: U20.16 2653.2,1165.05 2646.5,1171.76 2646.5,1224.17 2653.91,1231.58 2653.91,1468.91 2668.91,1483.91 ; v1(2668.91,1545.91) 2668.91,1483.91 ; v1(3332,2085.91) v1(3270.91,2085.91) 2668.91,1483.91
D6: U10.47 U20.17 U21.20 | length 2464.7
  Top Layer w8: U20.17 2676.91,1109.94 v1(2676.91,1201.91) ; v1(3324.91,1950.91) 3330,1956 3330,2001.82 ; U21.20 3330,2001.82 ; v1(3409.91,1979.91) 3351.91,1979.91 3330,2001.82 ; v1(3734.91,2344.91) 3827.91,2437.91 3827.91,2649.91 U10.47
  Bottom Layer w8: v1(2676.91,1201.91) 2677.91,1202.91 2677.91,1326.91 2886.91,1535.91 2886.91,1674.91 3162.91,1950.91 v1(3324.91,1950.91) ; v1(3409.91,1979.91) 3409.91,2036.91 3635.49,2262.49 3652.49,2262.49 v1(3734.91,2344.91)
D7: U10.48 U20.18 U21.21 | length 3320.1
  Top Layer w8: v1(3005.91,1978.91) 3013.91,1970.91 3064.91,1970.91 ; U21.21 3280,1986.91 ; v1(3456.91,2541.91) 3229.18,2314.18 3190.14,2314.18 3183.13,2307.17 3183.13,2268.13 3059.91,2144.91 3059.91,1975.91 3064.91,1970.91 ; 3064.91,1970.91 3079.91,1955.91 3265,1955.91 3280,1970.91 3280,1986.91 ; 3064.91,1970.91 3264,1970.91 3280,1986.91
  Bottom Layer w8: U20.18 2453.2,1743.91 2688.2,1978.91 v1(3005.91,1978.91) ; v1(3456.91,2541.91) 3518.41,2541.91 3533.91,2557.41 3533.91,2626.91 3550.91,2643.91 3607.91,2643.91 3633.91,2669.91 3633.91,2722.91 3648.41,2737.41 3712.41,2737.41 3739.91,2709.91 3739.91,2669.91 3783.91,2625.91 U10.48
GND: C201.2 C202.2 C301.1 C302.1 C303.1 C304.1 C306.2 C307.2 C308.2 C309.2 C310.2 C311.2 C312.2 C401.2 C402.2 C403.2 C404.1 C405.1 C406.1 J301.4 J302.1 J303.1 J401.3 J401.5 J401.9 J402.4 J402.5 J402.6 J402.7 J402.8 J402.9 J403.6 J403.B P301.3 P301.4 P301.5 P302.3 P302.4 P302.5 R301.1 U10.3 U10.49 U10.50 U10.99 U10.100 U20.5 U20.21 U21.16 U30.7 U40.8 U40.23 U40.35 U40.47 | length 23281.6
  Top Layer w8: v1(1416.27,2129.91) 1416.27,2044.13 v1(1452.91,2007.49) ; 1434.91,2129.91 v1(1434.91,2442.91) ; U21.16 3480,1538.91 3507,1565.91 v1(3634.91,1565.91) ; v1(3616.91,1630.91) v1(3616.91,2313.91)
  Top Layer w10: v1(4158.91,2293.91) 4183.91,2268.91 v1(4408.91,2268.91)
  Top Layer w12: C307.2 718.56,2694.5 U30.7 815.21,2693.91 858.91,2693.91
  Top Layer w16: R301.1 749.85,2374.82 C306.2 858.91,2602.97 858.91,2693.91
  Top Layer w20: v1@633.91,2743.91 633.91,2693.91 699.86,2693.91 C307.2
  Top Layer w25: C312.2 C308.2 174.85,859.85 208.91,893.91 683.91,893.91 ; P302.4 P302.5 579.58,1532.3 P302.3 579.58,1055.52 C302.1 567.97,1009.85 683.91,893.91 ; J301.4 683.91,893.91 ; C309.2 C310.2 1008.91,727.97 C311.2 967.97,884.85 958.91,893.91 ; J401.5 J401.3 1183.91,1243.91 1158.91,1218.91 ; v1(1583.91,1443.91) 1583.91,1368.91 J401.9 1333.91,1243.91 1308.91,1218.91 1158.91,1218.91 ; U20.21 v3(2153.2,1713.2) 2174.85,1734.85 C201.2 ; U20.5 2553.2,3074.62 2608.91,3018.91 C202.2 ; J302.1 3916.39,209.85 C303.1 4017.97,218.91 4133.91,218.91 4133.91,418.91 ; U10.99 U10.100 3958.91,518.91 4133.91,518.91 4133.91,418.91 ; P301.3 4281.15,1209.85 4345.03,1209.85 ; P301.5 4483.91,1618.91 4499.85,1602.97 4499.85,1209.85 C301.1 4345.03,1209.85 ; 683.91,893.91 958.91,893.91 ; 958.91,893.91 958.91,1168.91 1108.91,1168.91 1158.91,1218.91 ; 4133.91,418.91 4433.91,418.91 4465.8,450.8 4465.8,787.02 J303.1 4382.34,879.54 C304.1 4342.97,1207.79 4345.03,1209.85
  Bottom Layer w8: C401.2@804.9,2898.9 C401.2@809.89,2903.89 ; C405.1 1225.91,2022.06 1225.91,2170.92 1212,2184.84 1212,2377 1277.91,2442.91 v1(1434.91,2442.91) 1480.41,2442.91 1487.06,2436.26 C402.2 C403.2 1630.76,2647.06 U10.3 ; U40.47 v1(1452.91,2007.49) 1503.15,1957.25 1503.15,1922.91 1520.24,1905.82 1543.91,1905.82 1584.9,1864.84 1623.91,1864.84 1631.91,1872.84 1631.91,1939.42 1599.82,1971.51 1599.82,2022 1588.44,2033.38 U40.8 1588.44,2117.38 1575.91,2129.91 1703.91,2129.91 1720.89,2112.93 1720.89,2105.93 1767.91,2058.91 1767.91,1832.06 ; U40.35 1470.33,1727.49 1479.91,1717.91 ; C406.1 1562.06,1635.76 1479.91,1717.91 ; U40.23 1750.49,1830.33 1767.91,1812.91 ; C404.1 1807.91,1872.06 1767.91,1832.06 ; 2346.3,2334.45 3062.64,2334.45 3083.18,2313.91 v1(3616.91,2313.91) ; v1(3634.91,1565.91) 3687.91,1618.91 P301.4 ; 1479.91,1717.91 1735.91,1717.91 1767.91,1749.91 1767.91,1812.91 ; 1767.91,1812.91 1767.91,1832.06
  Bottom Layer w10: v1(4158.91,2293.91) 4180.17,2315.17 J403.B ; v1(4408.91,2268.91) 4416.39,2261.43 J403.6
  Bottom Layer w12: J402.4 J402.5 J402.6@880.17,3159.85
  Bottom Layer w16: v1(3616.91,1630.91) 3616.91,1583.91 v1(3634.91,1565.91) ; U10.49 U10.50 4158.91,2593.91 4180.17,2572.65 J403.B
  Bottom Layer w20: C401.2 809.89,2903.89 809.89,2969.89 884.11,3044.11 J402.6 ; C404.1 1883.91,2133.91 1950,2200 1950,2306.4 1978.05,2334.45 2346.3,2334.45
  Bottom Layer w25: J402.8 J402.9 J402.7 J402.6 J402.6@880.17,3159.85 ; v1(649.91,2743.91) C401.2@804.9,2898.9 ; C401.2 1580,2893.91 ; C406.1 1583.91,1572.06 v1(1583.91,1443.91) ; U10.3 1583.91,3318.91 1608.91,3343.91 2508.2,3343.91 2553.2,3298.91 U20.5 ; C404.1 1965.44,1872.06 1975,1862.5 1975,1737.5 1999.3,1713.2 v3(2153.2,1713.2) ; U10.50 3901.63,2576.19 P301.4 P301.5
JTCK: J401.4 U40.34 U40.37 | length 546.1
  Top Layer w8: J401.4 v1(1183.91,1652.74)
  Bottom Layer w8: v1(1183.91,1652.74) 1341.81,1810.64 U40.37 1479.91,1810.64 1490.01,1800.54 U40.34
JTDI: J401.8 U40.38 | length 403.7
  Top Layer w8: J401.8 v1(1283.91,1795.06)
  Bottom Layer w8: v1(1283.91,1795.06) 1299.91,1795.06 1335.18,1830.33 U40.38
JTDO: J401.6 U40.39 | length 469
  Top Layer w8: J401.6 v1(1233.91,1807.16)
  Bottom Layer w8: v1(1233.91,1807.16) 1251.72,1824.97 1303.7,1824.97 1328.75,1850.01 U40.39
JTMS: J401.2
KEY_CENTER: C308.1 J301.6 U10.58 | length 1893.3
  Top Layer w16: C308.1 361.67,787.61 J301.6
  Bottom Layer w16: J301.6 428,563 522.1,468.91 1758.91,468.91 1783.91,493.91 U10.58
KEY_DOWN: C309.1 J301.3 U10.84 | length 2752.3
  Top Layer w16: J301.3 699.85,409.85 C309.1
  Bottom Layer w16: J301.3 3033.91,393.91 3083.91,443.91 U10.84
KEY_LEFT: C310.1 J301.2 U10.60 | length 1552.4
  Top Layer w16: J301.2 648.67,318.91 958.91,318.91 1008.91,368.91 C310.1 1824.85,409.85 1883.91,468.91 U10.60
KEY_RIGHT: C311.1 J301.5 U10.57 | length 1932.9
  Top Layer w16: J301.5 573.67,729.15 599.85,702.97 783.91,702.97 C311.1
  Bottom Layer w16: J301.5 573.67,629.15 683.91,518.91 1733.91,518.91 1733.91,643.91 U10.57
KEY_UP: C312.1 J301.1 U10.86 | length 3199.4
  Top Layer w16: C312.1 392.97,393.91 J301.1
  Bottom Layer w16: J301.1 508.91,313 3103,313 3183.91,393.91 U10.86
LCD_CS: R202.2 U10.10 U20.6 | length 1714.5
  Top Layer w10: 1830,2650 1830,2915 ; 2010,3095 2010,3129.08 2006.74,3132.34 2006.74,3170.83 2010,3174.1 2010,3211.96
  Top Layer w12: 1830,2650 1883.91,2596.09 U10.10 ; 1830,2915 2010,3095 ; v1(2008.91,3268.91) 2008.91,3213.05 2010,3211.96
  Top Layer w16: U20.6 2453.2,3238.2 2483.91,3268.91 2658.91,3268.91 2680.76,3290.76 R202.2
  Bottom Layer w12: v1(2008.91,3268.91) 2433.91,3268.91 2453.2,3249.62 U20.6
LCD_RD: R204.2 U10.89 U20.8 | length 5247.9
  Top Layer w10: U10.89 3433.91,643.91 3708.91,643.91 3733.91,668.91 3733.91,768.91
  Top Layer w16: U20.8 2253.2,3316.35 R204.2 ; 3733.91,768.91 3808.91,843.91 3808.91,1393.91 3943.91,1393.91 4020,1470 4020,2330 4200,2510 4200,2960 v1(4170,2990)
  Bottom Layer w16: U20.8 2253.2,3049.62 2258.91,3043.91 2258.91,3020 4140,3020 v1(4170,2990)
LCD_RS: R203.2 U10.13 U20.7 | length 902.2
  Top Layer w16: U10.13 2083.91,2893.91 2108.91,2918.91 2258.91,2918.91 2353.2,3013.2 U20.7 2353.2,3216.35 R203.2
LCD_WR: R205.2 U10.53 U20.9 | length 3792.5
  Top Layer w12: v1(1537.5,1150) 1550,1137.5 1583.91,1137.5 U10.53 ; v1(2237.5,1675) 2337.5,1575 v1(2337.5,1562.5) ; v1(2262.5,2000) 2275,2000 2300,2025 2300,2325 2338.41,2363.41 2338.41,2712.75 2375,2749.34 v1(2375,2925)
  Top Layer w16: R205.2 2080.76,3272.06 2153.2,3199.62 U20.9 2153.2,3003.2 v1(2150,3000)
  Bottom Layer w12: v1(1537.5,1150) 2312.5,1150 2337.5,1175 v1(2337.5,1562.5) ; v1(2237.5,1675) 2262.5,1700 v1(2262.5,2000)
  Bottom Layer w16: v1(2150,3000) 2225,2925 v1(2375,2925)
LED_PWR: R101.1 U10.62 | length 5201.2
  Top Layer w12: U10.62 1983.91,353.59 3383.91,353.59 3437.5,300 v1(3437.5,250) ; v1(3775,1500) 3775,2175 3962.5,2362.5 3962.5,2983.23 R101.1
  Bottom Layer w12: v1(3437.5,250) 3937.5,250 4000,312.5 4000,925 3775,1150 v1(3775,1500)
NetC301_2: C301.2 P301.2 U10.22 | length 4860.3
  Top Layer w16: U10.22 2533.91,2643.91 2533.91,2868.91 3033.91,2868.91 3033.91,2943.91 3144.47,3054.47 4223.64,3054.47 4232.78,3045.33 4232.78,2484.02 4057.78,2309.02 4057.78,1459.02 3883.91,1285.15 3883.91,1143.91 3908.91,1118.91 4108.91,1118.91 4133.91,1143.91 P301.2 4133.91,1268.91 4192.97,1327.97 C301.2
NetC302_2: C302.2 P302.2 U10.21 | length 4011.8
  Top Layer w12: v1(1200,2587.5) 1325,2587.5 1375,2537.5 1626.96,2537.5 1637.5,2548.04 v1(1637.5,2875) ; v1(2475,2887.5) 2483.91,2878.59 U10.21
  Top Layer w16: P302.2 433.91,1059.85 C302.2
  Bottom Layer w12: v1(1637.5,2875) 1687.5,2875 1700,2862.5 2450,2862.5 v1(2475,2887.5)
  Bottom Layer w16: P302.2 433.91,2091.09 555.32,2212.5 1075,2212.5 1175,2312.5 1175,2562.5 v1(1200,2587.5)
NetC303_2: C303.2 J302.3 U10.96 | length 540.8
  Top Layer w16: U10.96 3683.91,493.91 3758.91,418.91 3758.91,343.91 3873.28,343.91 J302.3 3989.22,347.65 C303.2
NetC304_2: C304.2 J303.3 U10.97 | length 629.2
  Top Layer w16: U10.97 3783.91,743.91 3827.02,787.02 J303.3 4224.85,806.71 C304.2
NetC305_1: C305.1 R302.1 | length 137.8
  Top Layer w16: C305.1 R302.1
NetC305_2: C305.2 U10.16 | length 1535.5
  Top Layer w8: C305.2 1242.97,2518.91 1710.08,2518.91 1716.49,2512.5 1716.49,2346.01 1737.5,2325 1937.5,2325 1975,2362.5 1975,2487.5 2000,2512.5 2175,2512.5 2183.91,2521.41 U10.16
NetC306_1: C306.1 U30.2 U30.3 | length 317.8
  Top Layer w12: 908.91,2693.91 909.5,2694.5 U30.2 U30.3
  Top Layer w16: C306.1 908.91,2534.85 908.91,2693.91
NetC402_1: C402.1 U40.5 X401.2 | length 855.1
  Top Layer w8: 1468.24,1950 1487.15,1968.91 1487.15,2012.64 v1(1495.43,2020.91)
  Top Layer w12: v1(1270,2170) 1270,1970 1275.26,1964.74 1290,1950 1468.24,1950
  Bottom Layer w8: v1(1495.43,2020.91) 1511.91,2020.91 1529.38,2038.38 U40.5
  Bottom Layer w12: v1(1270,2170) 1343.91,2243.91 X401.2 1380.76,2252.77 C402.1
NetC403_1: C403.1 U40.6 X401.1 | length 970.1
  Top Layer w8: v1(1549.07,1940.91) 1599.37,1991.21 1599.37,2023.21 1654.41,2078.25 1654.41,2129.12 1780.2,2254.91 v1(1895.91,2254.91)
  Bottom Layer w8: v1(1549.07,1940.91) U40.6 ; X401.1 1884.91,2243.91 v1(1895.91,2254.91)
  Bottom Layer w12: C403.1 1737.06,2252.77 X401.1
NetHP1_2: HP1.2 R303.2 U30.5 | length 1105.1
  Top Layer w12: U30.5 857.14,2745.68
  Top Layer w16: HP1.2@140.21,2943.91 333.91,2943.91 433.91,3043.91 833.91,3043.91 880.76,2997.06 R303.2 880.76,2769.3 857.14,2745.68
NetHP1_3: HP1.3 U30.8 | length 849
  Top Layer w12: 783.91,2593.91 783.91,2668.91 U30.8
  Top Layer w16: HP1.3@140.21,2353.36 318.36,2353.36 558.91,2593.91 783.91,2593.91
NetJ402_2: J402.2 U40.32 | length 2347.4
  Top Layer w8: v1(1301.91,2484.91) 1518.91,2484.91 1533.14,2470.68 1533.14,2007.14 1512.82,1986.82 1511.91,1986.82 1503.15,1978.07 1503.15,1898.67 v1(1525.91,1875.91)
  Bottom Layer w8: J402.2 677.41,2870.33 603.91,2796.83 603.91,2706.91 638.82,2672 1290.5,2672 1301.91,2660.59 v1(1301.91,2484.91) ; v1(1525.91,1875.91) 1529,1872.82 1529,1818.57 1529.38,1818.18 U40.32
NetJ402_3: J402.3 U40.33 | length 2180.8
  Top Layer w8: v1(1060.91,2701.91) 1060.91,2067.91 1268.92,1859.9 1268.92,1850.91 1278.92,1840.91 v1(1457.91,1840.91)
  Bottom Layer w8: J402.3 708.91,3086.91 707.91,3085.91 707.91,2849.91 680.91,2822.91 679.41,2822.91 619.91,2763.41 619.91,2719.41 637.41,2701.91 v1(1060.91,2701.91) ; v1(1457.91,1840.91) 1495.7,1840.91 1509.7,1826.91 U40.33
NetJ403_2: J403.2 U10.36 | length 2132.4
  Bottom Layer w10: U10.36 3233.91,2643.91 3308.91,2643.91 3333.91,2668.91 3333.91,2763.91 3380,2810 4280,2810 4308.91,2781.09 4308.91,2118.91 4339.62,2088.2 J403.2
NetJ403_3: J403.3 U10.37 | length 2002.8
  Bottom Layer w10: U10.37 3290,2700 3290,2810 3350.28,2810 3384.19,2843.91 4308.91,2843.91 4333.91,2818.91 4333.91,2168.91 4371.31,2131.51 J403.3
NetJ403_5: J403.5 U10.35 | length 2067.7
  Bottom Layer w10: U10.35 3183.91,2818.91 3205,2840 3350,2840 3380,2870 3383.91,2868.91 4333.91,2868.91 4358.91,2843.91 4358.91,2243.91 4384.7,2218.12 J403.5
NetJ403_7: J403.7 U10.38 | length 2008
  Top Layer w10: U10.38 3333.91,2643.91 v1(3333.91,2893.91)
  Bottom Layer w10: v1(3333.91,2893.91) 4358.91,2893.91 4408.91,2843.91 4408.91,2343.91 4448.08,2304.74 J403.7
NetJ403_A: J403.A U10.33 | length 2869.8
  Top Layer w10: v1(4358.91,1968.91) 4383.91,1993.91 4458.91,1993.91 v1(4458.91,2493.91)
  Bottom Layer w10: U10.33 3083.91,2918.91 3108.91,2943.91 4408.91,2943.91 4458.91,2893.91 v1(4458.91,2493.91) ; J403.A 4324.66,1934.66 v1(4358.91,1968.91)
NetPWR_1: PWR.A R101.2 | length 108.9
  Top Layer w16: R101.2 PWR.A
NetR201_2: R201.2 U20.22 | length 149
  Top Layer w16: R201.2 2053.2,860.05 U20.22
NetR301_2: R301.2 U30.1 | length 407.2
  Top Layer w12: 958.91,2668.91 U30.1
  Top Layer w16: R301.2 933.91,2368.91 958.91,2393.91 958.91,2668.91
NetR302_2: R302.2 R303.1 U30.4 | length 301.6
  Top Layer w12: 983.91,2768.91 U30.4 1007.14,2745.68 1008.91,2743.91
  Top Layer w16: 983.91,2768.91 983.91,2915.76 R303.1 ; 1008.91,2743.91 1105.76,2743.91 R302.2
NetR401_1: R401.1 U40.43 | length 3302.6
  Top Layer w8: v1(3601.91,2478.91) 3633.91,2510.91 3633.91,2964.82 3655.91,2986.82 R401.1
  Bottom Layer w8: 1367.91,1928.75 1321.25,1928.75 1320,1930 1320,2138.08 1366.75,2184.84 1510.84,2184.84 1693.11,2367.11 1693.11,2434.91 1718.82,2460.62 3583.62,2460.62 v1(3601.91,2478.91)
NetR401_2: R401.2 USB.A | length 108.9
  Top Layer w16: R401.2 USB.A
NetU10_11: U10.11 U40.12 | length 1352.1
  Top Layer w8: v1(1693.91,2092.91) 2183.91,2092.91 2227.91,2136.91 2227.91,2626.91 2210.91,2643.91 2033.91,2643.91 U10.11
  Bottom Layer w8: U40.12 1667.18,2085.91 1686.91,2085.91 v1(1693.91,2092.91)
NetU10_14: U10.14 U40.13 | length 1344.4
  Top Layer w8: v1(1631.91,1997.18) 1631.91,1974.91 1567.91,1910.91 1527.91,1910.91 1519.15,1919.67 1519.15,1965.76 1579.91,2026.52 1579.91,2038.63 1591.91,2050.62 1596.62,2050.62 1612.91,2066.91 1612.91,2413.91 v1(1662.91,2463.91)
  Bottom Layer w8: v1(1631.91,1997.18) 1661.91,2027.18 U40.13 ; v1(1662.91,2463.91) 1739.91,2540.91 2030.91,2540.91 U10.14
NetU10_34: U10.34 U21.24 | length 790.1
  Top Layer w8: v1(3036.91,2299.91) 3083.91,2346.91 U10.34 ; U21.24 3130,2187 v1(3219.91,2276.91)
  Bottom Layer w8: v1(3036.91,2299.91) 3059.91,2276.91 v1(3219.91,2276.91)
NetU10_54: U10.54 U20.10 | length 3296.6
  Top Layer w12: U10.54 1629.41,639.41 1629.41,1179.41 1625,1183.81 v1(1625,1237.5) ; v1(1875,2387.5) 1937.5,2450 1937.5,2862.5 2053.2,2978.2 U20.10 ; v1(1975,1237.5) 1975,1687.5 v1(2075,1787.5) ; v1(2100,2175) v1(2100,2400)
  Bottom Layer w12: v1(1625,1237.5) v1(1975,1237.5) ; v1(1875,2387.5) 1887.5,2400 v1(2100,2400) ; v1(2075,1787.5) 2100,1812.5 v1(2100,2175)
NetU10_67: U10.67 U21.22 | length 2526.9
  Top Layer w8: v1(2075,1612.5) 2106.91,1612.5 2106.91,870.91 U10.67 ; U21.22 3230,2140 v1(3236.91,2146.91)
  Bottom Layer w8: v1(2075,1612.5) 2250.5,1612.5 2744.82,2106.82 3123.82,2106.82 3149.91,2132.91 3222.91,2132.91 v1(3236.91,2146.91)
NetU10_68: U10.68 U21.29 | length 2517
  Top Layer w8: v1(2206.91,1543.91) 2206.91,814.91 2257.91,763.91 2376.91,763.91 2433.91,706.91 2433.91,450.91 2401.91,418.91 2315.91,418.91 2283.91,450.91 U10.68 ; v1(2879.91,2076.91) 2879.91,2075 2880,2074.91 U21.29
  Bottom Layer w8: v1(2206.91,1543.91) 2660.91,1997.91 2800.91,1997.91 v1(2879.91,2076.91)
NetU10_73: U10.73 U20.19 | length 387.9
  Top Layer w16: U20.19 2583.91,755.52 U10.73
NetU10_74: U10.74 U20.20 | length 532.5
  Top Layer w12: U20.20@2258.58,986.23 2536.54,708.27 2536.54,646.54
  Top Layer w16: U20.20 U20.20@2258.58,986.23 ; 2536.54,646.54 2583.91,599.17 U10.74
NetU10_85: U10.85
NetU10_93: U10.93 U40.30 | length 2914.8
  Top Layer w8: v1(1661.91,1857.91) 1741.91,1937.91 2519.91,1937.91 2566.91,1890.91 2566.91,1429.91 2829.91,1166.91 3110.91,1166.91 3383.05,894.77 3415.91,894.77 3436.15,874.53 3436.15,841.67 U10.93
  Bottom Layer w8: U40.30 1568.75,1794.91 1578.85,1805.01 1609.01,1805.01 v1(1661.91,1857.91) v1@1662.91,1858.91
NetU10_94: U10.94 U40.31 | length 3862.9
  Top Layer w8: v1(1351.91,1728.91) 1408.91,1785.91 1509.91,1785.91 v1(1558.91,1834.91)
  Bottom Layer w8: v1(1351.91,1728.91) 1351.91,971.91 1466.91,856.91 3341.58,856.91 ; U40.31 1549.07,1825.07 v1(1558.91,1834.91) ; U10.94 3627.91,637.91 3627.91,819.68 ; 3341.58,856.91 3458.12,856.91 ; 3341.58,856.91 3369.93,828.55 3429.76,828.55 3458.12,856.91 ; 3458.12,856.91 3590.68,856.91 ; 3590.68,856.91 3591.91,856.91 3627.91,820.91 3627.91,819.68 ; 3590.68,856.91 3627.91,819.68
NRST: J401.10 U40.7 | length 697.8
  Top Layer w8: J401.10 1333.91,1577.91 1383.91,1627.91 1399.55,1627.91 1574.91,1803.27 1591.91,1803.27 1600.75,1812.11 v1(1600.75,1894.75)
  Bottom Layer w8: U40.7 1568.75,2002.82 1578.98,1992.59 1578.98,1916.52 v1(1600.75,1894.75)
VCC: C201.1 C202.1 C307.1 C404.2 C405.2 C406.2 J401.1 J403.4 P301.1 P302.1 PWR.K R201.1 R202.1 R203.1 R204.1 R205.1 U10.1 U10.2 U20.1 U20.2 U20.3 U20.4 U21.32 U30.6 U40.1 U40.9 U40.24 U40.36 U40.44 U40.48 USB.K | length 16297.8
  Top Layer w10: v2(1730,1660) v1(1730,1761.41) ; v2(2720,1890) 2730,1900 U21.32
  Top Layer w12: C307.1 791.78,2720.09 U30.6 885.09,2720.09 933.91,2768.91 ; 4258.91,1768.91 4258.91,2143.91 4283.91,2168.91 4383.91,2168.91 4389.82,2174.82
  Top Layer w16: 933.91,2768.91 933.91,2993.91 958.91,3018.91
  Top Layer w25: v1(958.91,1368.91) J401.1 1133.91,1443.91 ; 958.91,3018.91 1458.91,3018.91 1483.91,2993.91 ; v2(1060,1460) 1076.09,1443.91 1133.91,1443.91 ; v2(1120,2160) 1208.91,2248.91 1225,2248.91 ; v3(1225,2450) 1225,2248.91 ; v3(1250,2625) 1262.5,2637.5 1483.91,2637.5 U10.1 1483.91,2993.91 ; v1(1381.91,2066.91) 1351.91,2066.91 1316.91,2101.91 1316.91,2242.91 1310.91,2248.91 1225,2248.91 ; 1726.09,843.91 R201.1 ; 1728.91,846.73 1728.91,1528.91 ; v2@1728.91,1658.91 1728.91,1528.91 ; v1(1887.5,1662.5) 1887.5,1812.5 1927.97,1852.97 C201.1 2497.03,1852.97 2510,1840 v2(2510,1700) ; R205.1 2187.06,3415.76 ; R204.1 2387.06,3412.61 ; R203.1 2587.06,3412.61 ; U20.4 U20.3 ; R202.1@2803,3327.97 USB.K PWR.K 4124.85,3327.97 4124.85,3127.97 4158.91,3093.91 4508.91,3093.91 4508.91,1793.91 4483.91,1768.91 4258.91,1768.91 4208.91,1768.91 4124.85,1684.85 4124.85,1459.85 3988.24,1323.24 P301.1 ; C202.1 2942.97,3141.35 U20.1 U20.2 U20.3 ; 1133.91,1443.91 v1(1458.91,1443.91) 1458.91,1502.91 1484.91,1528.91 1728.91,1528.91 ; 1483.91,2993.91 1483.91,3368.91 1530.76,3415.76 2187.06,3415.76 ; 2187.06,3415.76 2762.06,3415.76 2787.06,3390.76 R202.1 2787.06,3222.06 2758.91,3193.91 2758.91,3157.3 U20.3
  Bottom Layer w8: v1(1381.91,2066.91) 1400.45,2048.37 U40.48 ; U40.44 1351.56,1948.44 1350,1950 1350,2020 1357.18,2027.18 U40.48 ; C406.2@1444.84,1604.84 1450.64,1599.03 U40.36 ; U40.1 1450.64,2039.91 1425.91,2039.91 1425.91,2027.18 U40.48
  Bottom Layer w10: U40.24@1728.91,1810.64 1728.91,1762.5 v1(1730,1761.41)
  Bottom Layer w12: 4383.91,2168.91 4389.82,2174.82 J403.4
  Bottom Layer w25: P302.1 288.24,1114.58 308.91,1093.91 908.91,1093.91 958.91,1143.91 v1(958.91,1368.91) ; v2(1060,1460) 1060,1450 1120,1510 1120,1910 ; v2(1120,2160) 1120,1910 ; C405.2 1125.76,1915.76 1120,1910 ; v3(1225,2450) 1225,2525 1250,2550 v3(1250,2625) ; C406.2@1444.84,1604.84 1444.84,1457.98 v1(1458.91,1443.91) ; v2(1730,1660) 1830,1660 1832.5,1662.5 ; C404.2 1883.91,1713.91 1832.5,1662.5 ; v1(1887.5,1662.5) 1832.5,1662.5 ; v2(2510,1700) 2650,1700 2720,1770 v2(2720,1890)
pads on no net: HP1.1 HP1.4 J302.2 J302.4 J303.2 J303.4 J401.7 J402.MH1 J402.MH2 J403.1 J403.8 J403.G0 J403.G1 J403.G2 J403.G3 U10.4 U10.12 U10.15 U10.17 U10.18 U10.23 U10.24 U10.25 U10.26 U10.27 U10.28 U10.29 U10.30 U10.31 U10.32 U10.55 U10.56 U10.59 U10.61 U10.63 U10.64 U10.65 U10.66 U10.69 U10.70 U10.71 U10.72 U10.76 U10.87 U10.90 U10.91 U10.92 U10.98 U20.23 U20.24 U20.D1 U20.D2 U20.D3 U20.D4 U40.2 U40.3 U40.4 U40.10 U40.11 U40.14 U40.15 U40.16 U40.17 U40.18 U40.19 U40.20 U40.21 U40.22 U40.25 U40.26 U40.27 U40.28 U40.29 U40.40 U40.41 U40.42 U40.45 U40.46
copper on no net: | length 190.7
  Top Layer w12: 3383.91,1200.91 3415.45,1200.91 3415.45,1240.45 3500,1325

## Keep-outs
Keep-Out Layer:
  the board outline again, w3.94

## Silkscreen, mask and mechanical layers (free items; w line width, h text height)
Mechanical 15:
  circle w10: c196.86,3307.1 r157.48
  circle w10: c4370.09,3307.1 r157.48
  circle w10: c4370.09,196.86 r157.48
  circle w10: c196.86,196.86 r157.48

## Text inside footprints (layer, text, board x,y; h text height)
J402: Mechanical 1 "PCB Edge" at 549.99,3485.93 h9.84 r180
U10: Bottom Overlay "USB" at 1308.91,1618.91 h60 r90; Bottom Overlay "P2" at 1302.81,709.66 h60 r90; Bottom Overlay "P1" at 1302.81,2717.53 h60 r90
U20: Top Overlay "24" at 1673.67,1045.29 h60 r270; Top Overlay "13" at 3071.31,1025.6 h60 r270; Top Overlay "12" at 1673.67,3190.96 h60 r270; Top Overlay "1" at 3071.31,3171.27 h60 r270